# Altium PCB bidirectional_audio_v4.0.PcbDoc
Units mil, origin at the board's own origin, x right, y up, seen from the top; angles counter-clockwise.
Board outline 1509.03 x 3854.32 mil, 4 copper layers (Top Layer, Gnd1, Vreg, Bottom Layer); 102 components, 71 nets, 302 pads, 148 vias.
Unrouted connection lines stored in the file: 89.
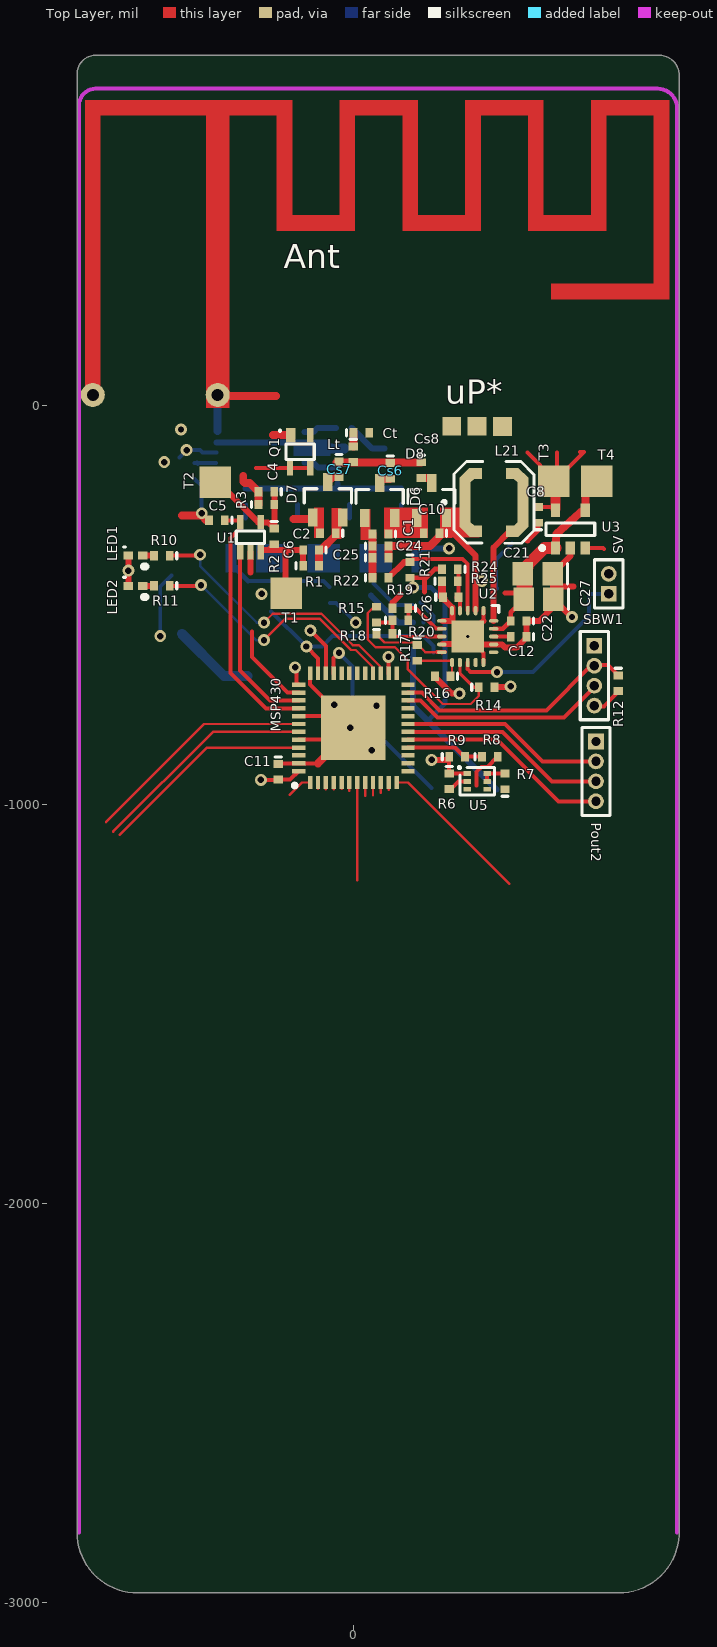
[diagram p0: Top Layer view]
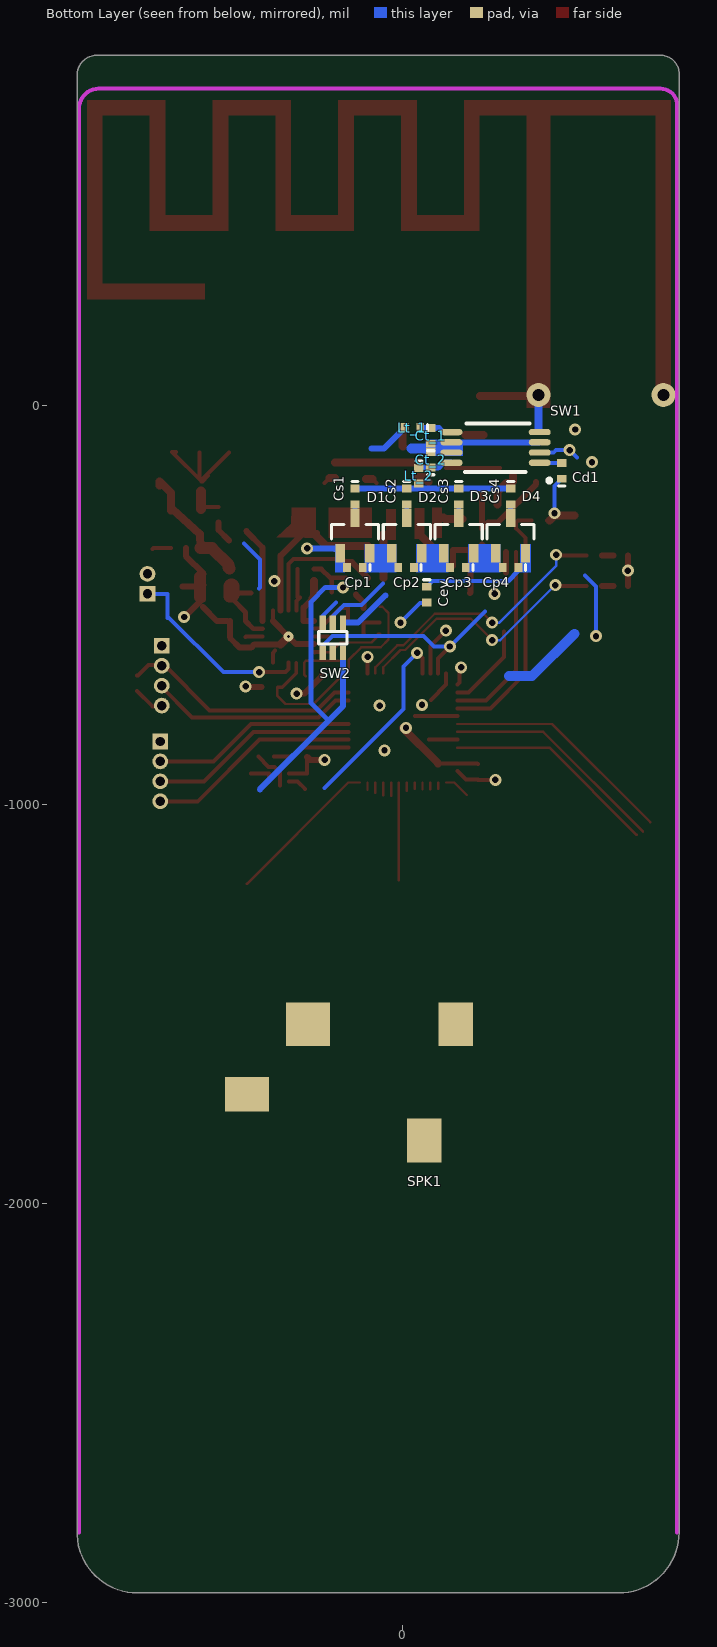
[diagram p1: Bottom Layer view, seen from below]
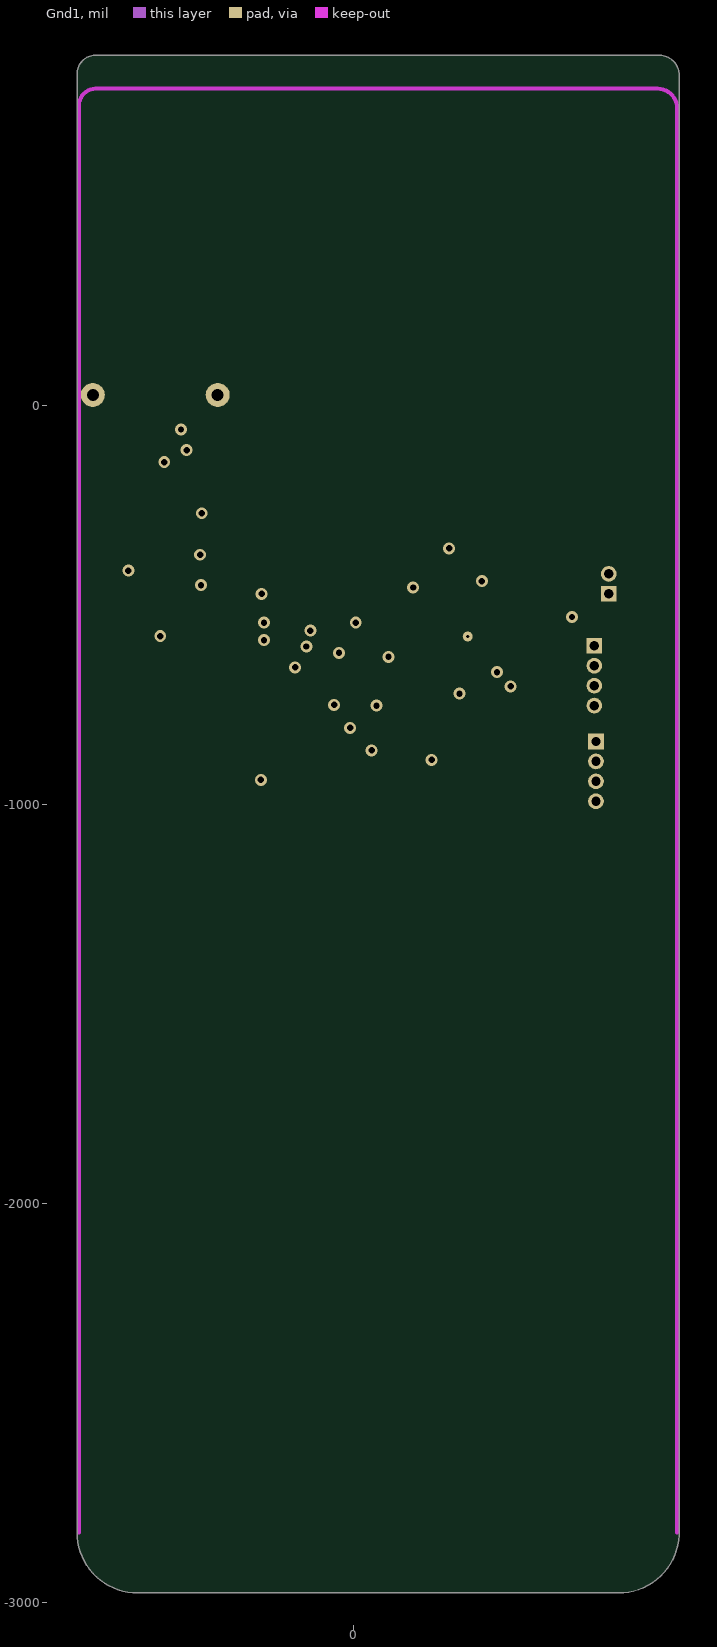
[diagram p2: Gnd1]
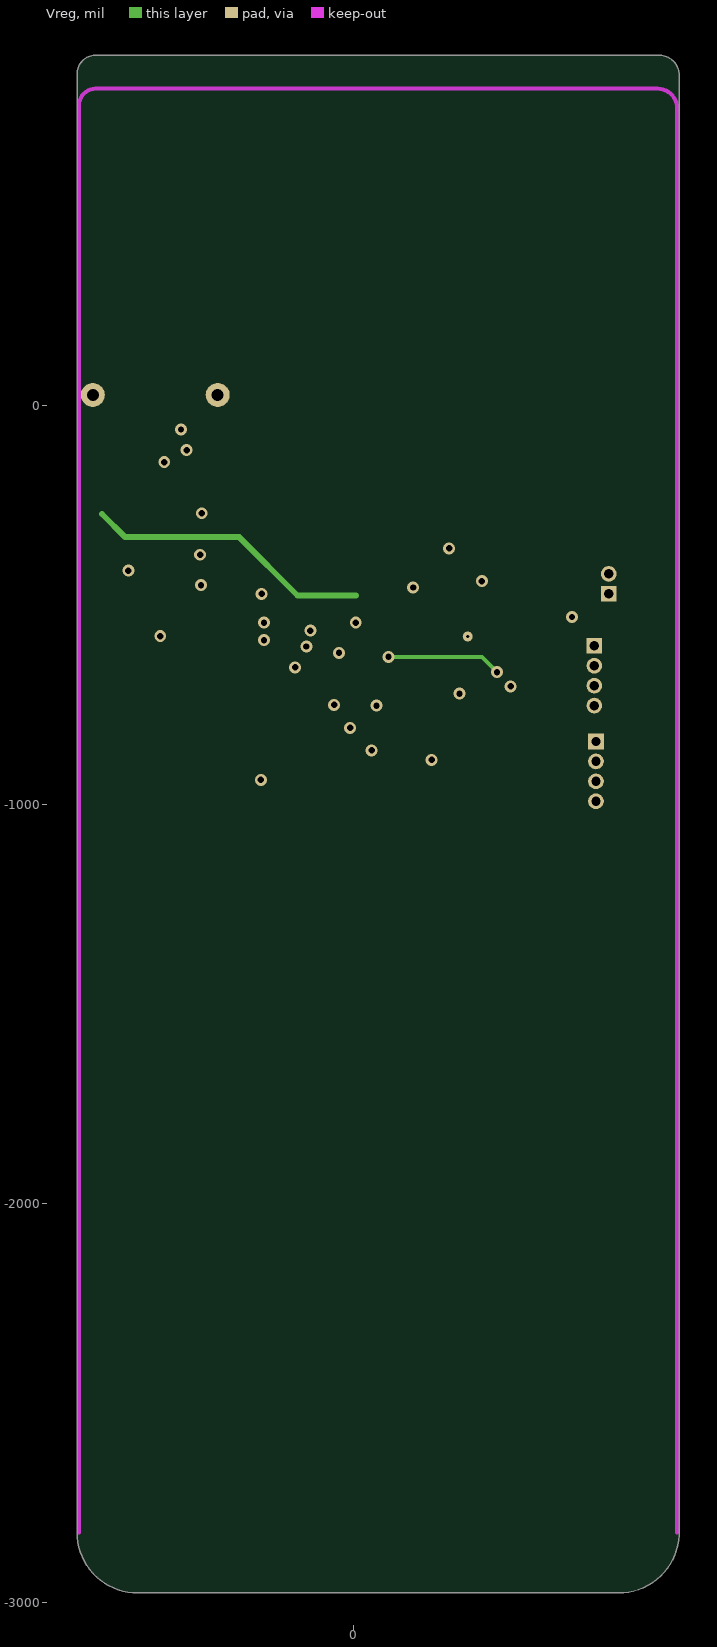
[diagram p3: Vreg]

## Layer stack, top to bottom
Top Layer: signal copper 1.4
Dielectric: core 12.6, FR-4, Dk 4.8
Gnd1: signal copper 1.4
Dielectric: prepreg 12.6, FR-4, Dk 4.8
Vreg: signal copper 1.4
Dielectric: core 12.6, FR-4, Dk 4.8
Bottom Layer: signal copper 1.4

## Board outline
-692.52,-2824 -692.52,831.28 cw(c-645.88,831.28) -648.1,877.86 cw(c-645.88,873.36) -645.88,878.38 766.4,878.38 cw(c766.4,873.36) 768.33,877.99 cw(c766.4,827.92) 816.52,827.92 cw(c766.4,827.92) 816.51,827.62 816.52,827.92 816.52,-2830 cw(c811.5,-2830) 816.34,-2831.32 cw(c664.58,-2824) 664.58,-2975.94 -540.58,-2975.94 cw(c-540.58,-2824)

## Design rules (kind name [scope] priority, off if disabled: settings)
Clearance "Clearance~Sunstone Circuits" [All] p1: gap=6 // Sunstone Circuits Minimum Clearance Rule (MLB~4&6 Layer Designs)
HoleSize "HoleSize~Sunstone Circuits" [All] p1: absolutevalues=TRUE maxlimit=251 minlimit=8 maxpercent=80.000 minpercent=20.000 // Sunstone Circuits Hole Size Rule (MLB~4&6 Layer Designs)
HoleSize Testpoint [All] p2: absolutevalues=TRUE maxlimit=100 minlimit=1 maxpercent=80.000 minpercent=20.000
HoleSize TestPointUsage [All] p3: absolutevalues=TRUE maxlimit=100 minlimit=1 maxpercent=80.000 minpercent=20.000
MinimumAnnularRing "MinimumAnnularRing~Sunstone Circuits" [All] p1: minimumring=7 // Sunstone Circuits Minimum Annular Ring (MLB~4&6 Layer Designs)
MinimumSolderMaskSliver [All] p1: minsoldermaskwidth=0
PlaneClearance "PlaneClearance~Sunstone Circuits" [All] p1: clearance=12 // Sunstone Circuits Power Plane Clearance Rule (MLB~4&6 Layer Designs)
PlaneConnect "PlaneConnect~Sunstone Circuits" [All] p1: planeconnectstyle=Relief reliefexpansion=10 reliefentries=4 reliefconductorwidth=8 reliefairgap=10 // Sunstone Circuits Power Plane Connect Rule (MLB~4&6 Layer Designs)
PolygonConnect "PolygonConnect~Sunstone Circuits" [All] p1: connectstyle=Relief reliefconductorwidth=8 reliefentries=4 polygonreliefangle="90 Angle" airgapwidth=10 // Sunstone Circuits Polygon Connect Style (MLB~4&6 Layer Designs)
RoutingVias "RoutingVias~Sunstone Circuits" [All] p1: holewidth=16 width=30 viastyle="Through Hole" minholewidth=8 minwidth=24 maxholewidth=20 maxwidth=40 // Sunstone Circuits Routing Vias Rule (MLB~4&6 Layer Designs)
ShortCircuit "ShortCircuit~Sunstone Circuits" [All] p1: allowed=FALSE // Sunstone Circuits Short Circuit Rule~Do Not Allow (MLB~4&6 Layer Designs)
SolderMaskExpansion "SolderMaskExpansion~Sunstone Circuits" [All] p1: expansion=3 // Sunstone Circuits Solder Mask Expansion Rule (MLB~4&6 Layer Designs)
ViasUnderSMD "ViasUnderSMD~Sunstone Circuits" [All] p1: allowed=FALSE // Sunstone Circuits Vias Under SMD~Do Not Allow (MLB~4&6 Layer Designs)
Width "Width~Sunstone Circuits" [All] p1: maxlimit=100 minlimit=6 preferedwidth=10 // Sunstone Circuits Minimum Width Rule (MLB~4&6 Layer Designs)
23 further rules are at their usual default settings.

## Classes and differential pairs
component class bidirectional_audio_v4.0_AFE: Ant C1 C2 C4 C5 C6 C8 C10 C12 C21 C22 C24 C25 C26 C27 Cd1 Cev Cp1 Cp2 Cp3 Cp4 Cs1 Cs2 Cs3 Cs4 Cs6 Cs7 Cs8 Ct Ct_1 Ct_2 D1 D2 D3 D4 D6 D7 D8 L21 Lt Lt_1 Lt_2 Q1 Q2 R1 R2 R3 R14 R15 R16 R17 R18 R19 R20 R21 R22 R24 R25 SMA1 SPK SPK1 SW1 SW2 T1 T2 T3 T4 T5 TF1 U1 U2 U3 uP*
component class bidirectional_audio_v4.0_Digital: 0 1 2 3 4 5 6 7 8 9 # * A B C C11 LED1 LED2 MSP430 Pout2 R6 R7 R8 R9 R10 R11 R12 SBW1 SV U5

## Components (designator, comment, footprint, x,y, rotation, side; value= is the part's Value field where it differs from the comment)
0 "Cap touch" CAPTOUCH-8mm#1 -4386,-1372 r90 top
1 "Cap touch" CAPTOUCH-8mm#2 -4000,-1392 r90 top
2 "Cap touch" CAPTOUCH-8mm#3 -3554,-1392 r90 top
3 "Cap touch" CAPTOUCH-8mm#4 -4382,-1780 r90 top
4 "Cap touch" CAPTOUCH-8mm#5 -3986,-1786 r90 top
5 "Cap touch" CAPTOUCH-8mm#6 -3542,-1786 r90 top
6 "Cap touch" CAPTOUCH-8mm#7 -4408,-2164 r90 top
7 "Cap touch" CAPTOUCH-8mm#8 -4034,-2166 r90 top
8 "Cap touch" CAPTOUCH-8mm#9 -3588,-2166 r90 top
9 "Cap touch" CAPTOUCH-8mm#10 -4022,-2598 r90 top
# "Cap touch" CAPTOUCH-8mm#11 -3586,-2634 r90 top
* "Cap touch" CAPTOUCH-8mm#12 -4436,-2618 r0 top
A "Cap touch" CAPTOUCH-8mm#13 -4376,-1018 r90 top
Ant "ANT" PIFA_915MHZ -340,-6 r0 top net-tie
B "Cap touch" CAPTOUCH-8mm#13 -3976,-1018 r90 top
C "Cap touch" CAPTOUCH-8mm#13 -3576,-1018 r90 top
C1 "Cp_rect" 0402 68,-322 r180 top
C2 "Cdemod_1" 0402 -64,-320 r180 top
C4 "Cdemod_2" 0402 -218,-216 r180 top
C5 "Decap_rx" 0402 -342,-288 r180 top
C6 "Cdemod_3" 0402 -106,-362 r180 top
C8 "Cout_LDO" 0402 464,-274 r90 top
C10 "Cp_rect" 0402 196,-320 r180 top
C11 "Cdecap_MSP" 0402 -188,-918 r270 top
C12 "Cbat" 0402 414,-580 r180 top
C21 "Cstore" 0805-W 462,-422 r180 top
C22 "Cstore" 0402 414,-540 r180 top
C24 "Cin_boost1" 0402 68,-352 r0 top
C25 "Cin_boost2" 0402 68,-382 r0 top
C26 "Cref" 0402 244,-480 r0 top
C27 "Cstore2" 0805-W 464,-486 r180 top
Cd1 "Decap_SW" 0402 -398,-164 r90 bottom
Cev "Cout_env" 0402 -60,-474 r270 bottom
Cp1 "Cp_env" 0402 120,-406 r0 bottom
Cp2 "Cp_env" 0402 -8,-406 r0 bottom
Cp3 "Cp_env" 0402 -138,-406 r0 bottom
Cp4 "Cp_env" 0402 -270,-406 r0 bottom
Cs1 "Cs_env" 0402 120,-228 r270 bottom
Cs2 "Cs_env" 0402 -10,-228 r270 bottom
Cs3 "Cs_env" 0402 -140,-228 r270 bottom
Cs4 "Cs_env" 0402 -270,-228 r270 bottom
Cs6 "Cs_rect" 0402 92,-164 r270 top
Cs7 "Cs_rx" 0402 -36,-160 r270 top
Cs8 "Cs_rect" 0402 170,-162 r270 top
Ct "C_Ant_tune" 0402 20,-68 r0 top
Ct_1 "Cap" 0402 -70,-76 r90 bottom
Ct_2 "Cap" 0402 -70,-136 r90 bottom
D1 "SMS7630-005" "SOT23 - N" 120,-326 r90 bottom
D2 "SMS7630-005" "SOT23 - N" -10,-326 r90 bottom
D3 "SMS7630-005" "SOT23 - N" -140,-326 r90 bottom
D4 "SMS7630-005" "SOT23 - N" -270,-326 r90 bottom
D6 "SMS7630-005" "SOT23 - N" 66,-238 r90 top
D7 "SMS7630-005" "SOT23 - N" -64,-236 r90 top
D8 "SMS7630-005" "SOT23 - N" 196,-238 r90 top
L21 "Ind_LPS4018" LPS4018 344,-238 r90 top
LED1 "LED" "Diode - 0402" -546,-376 r0 top
LED2 "LED" "Diode - 0402" -546,-452 r0 top
Lt "L_Ant_tune" 0402 0,-122 r270 top
Lt_1 "Ind" 0402 -24,-56 r0 bottom
Lt_2 "Ind" 0402 -40,-176 r270 bottom
MSP430 "MSP430 Wolverine 48-Pin" MSP_QFN48_RGZ_PAD0 0,-808 r90 top
Pout2 "MHDR1X4" MHDR1X4 608,-842 r270 top
Q1 "BF1101WR" SOT343R -134,-114 r180 top
Q2 "BF1101WR" SOT343R 1055,-76 r0 top
R1 "Res_demod1" 0402 -106,-402 r0 top
R2 "Res_demod2" 0402 -198,-328 r270 top
R3 "Res_demod3" 0402 -218,-248 r0 top
R6 "Res_HSS" 0402 240,-941.69 r270 top
R7 "Res_HSS" 0402 380,-942 r90 top
R8 "Res_HSS" 0402 342,-880 r0 top
R9 "Res_HSS" 0402 260,-880 r0 top
R10 "Res_LED" 0402 -480,-376 r180 top
R11 "Res_LED" 0402 -480,-452 r180 top
R12 "Res_flash" 0402 664,-696 r270 top
R14 "Rout1" 0402 334,-706 r0 top
R15 "Rout2" 0402 58,-524 r90 top
R16 "Rok1" 0402 224,-678 r180 top
R17 "Rok2" 0402 160,-620 r270 top
R18 "Rok3" 0402 78,-572 r180 top
R19 "Rov1" 0402 118,-508 r180 top
R20 "Rov2" 0402 118,-538 r0 top
R21 "R_80%" 0402 142,-412 r270 top
R22 "R_50%" 0402 68,-432 r0 top
R24 "Res_MPPTfixed" 0402 242,-410 r180 top
R25 "Res_MPPTfixed" 0402 242,-440 r0 top
SBW1 "MHDR1X4" MHDR1X4 604,-602 r270 top
SMA1 "SMA Port" "SMA - Hole - 2 Pin" -1028,172 r90 top
SPK "Header 2" HDR1X2 -1228,-118 r0 top
SPK1 "Headphone jack" CONN_JACK -132.74,-1550.66 r0 bottom
SV "MHDR1X2" MHDR1X2 640,-472 r90 top
SW1 "ADG919" MSOP_8pin -230,-106 r0 bottom
SW2 "ADG841" SC70-6 174,-582 r0 bottom
T1 "Test Point SMT" SMT_TESTPOINT_2MM -168,-470 r90 top
T2 "Test Point SMT" SMT_TESTPOINT_2MM -346,-192 r0 top
T3 "Test Point SMT" SMT_TESTPOINT_2MM 502,-190 r0 top
T4 "Test Point SMT" SMT_TESTPOINT_2MM 610,-190 r0 top
TF1 "Audio_TF" AUDIO_TF -968,-232 r270 bottom
U1 "Comparator" SC70-5 -258,-330 r0 top
U2 "BQ25570" BQ25570 286.63,-579.04 r270 top
U3 "TPS780270200DDCT" TI-DDC5_L 544,-310 r90 top
U5 "SI1016X" "SC-89-6 Vishay" 310,-942 r0 top
uP* "Electret Microphone" uP_23024 310,-52 r180 top

## Footprints (in the part's own frame and the unit in brackets; to place one, negate y for a bottom-side part, rotate by r counter-clockwise, add the part's x,y. Pads: shape width x height; smd on the part's side, far side on the other; paste and mask are expansions set on the pad)
0402 [mm] "Surface Mount; Body 1 x 0.5 mm (LxW typ)"
  rect 0.5x0.6 smd: 1(-0.5,0) 2(0.5,0)
  silkscreen extent -0.95,-0.2 -0.95,0.2, body extent -0.5,-0.25 0.5,0.25, height 0.5
0805-W [mm] "Surface Mount - Wide; Body 2.0 x 1.25 mm (LxW typ)"
  rect 1.3x1.5 smd: 1(-0.95,0) 2(0.95,0)
  silkscreen extent -1.9,-0.65 -1.9,0.65, body extent -1,-0.62 1,0.63, height 1.25
AUDIO_TF [mil] "Audio Transformer Triad"
  round 60 hole 30: 1(0,0) 2(0,100) 3(0,200) 4(300,200) 5(300,100) 6(300,0)
  body extent -30,-35 330,235, height 100
BQ25570 [mm] "Boost Charger"
  oval 0.6x0.24 smd paste-0.025 mask+0.07: 1(-1.65,1) 2(-1.65,0.5) 3(-1.65,0) 4(-1.65,-0.5) 5(-1.65,-1) 11(1.65,-1) 12(1.65,-0.5) 13(1.65,0) 14(1.65,0.5) 15(1.65,1)
  oval 0.24x0.6 smd paste-0.025 mask+0.07: 6(-1,-1.65) 7(-0.5,-1.65) 8(0,-1.65) 9(0.5,-1.65) 10(1,-1.65) 16(1,1.65) 17(0.5,1.65) 18(0,1.65) 19(-0.5,1.65) 20(-1,1.65)
  round 0.635 hole 0.203: 21(0,0)
  rect 2.05x2.05 smd: 21(0,0)
  silkscreen extent -1.97,1.54 -1.54,1.98, body extent -1.82,-1.82 1.83,1.83, height 1.01
CAPTOUCH-8mm#1 [mil]
  oct 315x315 smd: 1(-46,-10)
CAPTOUCH-8mm#2 [mil]
  oct 315x315 smd: 1(-26,-24)
CAPTOUCH-8mm#3 [mil]
  oct 315x315 smd: 1(-26,22)
CAPTOUCH-8mm#4 [mil]
  oct 315x315 smd: 1(-38,-6)
CAPTOUCH-8mm#5 [mil]
  oct 315x315 smd: 1(-32,-10)
CAPTOUCH-8mm#6 [mil]
  oct 315x315 smd: 1(-32,34)
CAPTOUCH-8mm#7 [mil]
  oct 315x315 smd: 1(-54,-32)
CAPTOUCH-8mm#8 [mil]
  oct 315x315 smd: 1(-52,-58)
CAPTOUCH-8mm#9 [mil]
  oct 315x315 smd: 1(-52,-12)
CAPTOUCH-8mm#10 [mil]
  oct 315x315 smd: 1(-20,-46)
CAPTOUCH-8mm#11 [mil]
  oct 315x315 smd: 1(16,-10)
CAPTOUCH-8mm#12 [mil]
  oct 315x315 smd: 1(60,0)
CAPTOUCH-8mm#13 [mil]
  oct 315x315 smd: 1(0,0)
CONN_JACK [mm] "PCB footprint for the headphone jack"
  rect 2.2x2.8 smd: 1(0,0) 3(2,7.4)
  rect 2.8x2.8 smd: 2(9.4,0)
  rect 2.8x2.2 smd: 4(13.3,4.45)
"Diode - 0402" [mm] "Diode: Body 1.6 x 0.8 mm (LxW typ)"
  rect 0.6x0.5 smd: 1(0.45,0) 2(-0.45,0)
  silkscreen extent -0.75,-0.7 0.63,0.55
HDR1X2 [mm] "Connector; Header; 2 Position"
  rect 1.5x1.5 hole 0.9: 1(0,0)
  round 1.5 hole 0.9: 2(2.54,0)
  silkscreen extent -1.27,-1.27 3.81,1.27
LPS4018 [mil] "Inductor"
  rect 28x31.5 smd: 1(-77.03,37.61) 1(67.97,37.61) 2(-77.03,-54.39) 2(67.97,-54.39)
  rect 35.5x28 smd rot 45: 1(-68.53,55.61) 2(59.47,-72.39)
  rect 123x28 smd: 1(-4.53,64.11) 2(-4.53,-80.89)
  rect 35.5x28 smd rot 135: 1(59.47,55.61) 2(-68.03,-72.89)
  silkscreen extent -107,-109 98,120, body extent -85,-89 76,72, height 71
MHDR1X2 [mm] "Connector; Header; 2 Position"
  rect 1x1 hole 0.6: 1(0,0)
  round 1 hole 0.6: 2(1.27,0)
  silkscreen extent -0.9,-0.9 2.17,0.9
MHDR1X4 [mm] "Connector; Header; 4 Position"
  rect 1x1 hole 0.6: 1(0,0)
  round 1 hole 0.6: 2(1.27,0) 3(2.54,0) 4(3.81,0)
  silkscreen extent -0.9,-0.9 4.71,0.9
MSOP_8pin [mm]
  oval 1.4x0.4 smd: 1(-2.872,0.95) 2(-2.872,0.3) 3(-2.872,-0.35) 4(-2.87,-1.001) 5(2.745,-1) 6(2.745,-0.35) 7(2.745,0.3) 8(2.745,0.95)
  silkscreen extent -3.6,-1.55 1.88,2.21
MSP_QFN48_RGZ_PAD0 [mm]
  rect 4.1x4.1 smd: 0(0,0)
  rect 0.85x0.28 smd: 1(-3.475,2.75) 2(-3.475,2.25) 3(-3.475,1.75) 4(-3.475,1.25) 5(-3.475,0.75) 6(-3.475,0.25) 7(-3.475,-0.25) 8(-3.475,-0.75) 9(-3.475,-1.25) 10(-3.475,-1.75) 11(-3.475,-2.25) 12(-3.475,-2.75) 25(3.475,-2.75) 26(3.475,-2.25) 27(3.475,-1.75) 28(3.475,-1.25) 29(3.475,-0.75) 30(3.475,-0.25) 31(3.475,0.25) 32(3.475,0.75) 33(3.475,1.25) 34(3.475,1.75) 35(3.475,2.25) 36(3.475,2.75)
  rect 0.28x0.85 smd: 13(-2.75,-3.475) 14(-2.25,-3.475) 15(-1.75,-3.475) 16(-1.25,-3.475) 17(-0.75,-3.475) 18(-0.25,-3.475) 19(0.25,-3.475) 20(0.75,-3.475) 21(1.25,-3.475) 22(1.75,-3.475) 23(2.25,-3.475) 24(2.75,-3.475) 37(2.75,3.475) 38(2.25,3.475) 39(1.75,3.475) 40(1.25,3.475) 41(0.75,3.475) 42(0.25,3.475) 43(-0.25,3.475) 44(-0.75,3.475) 45(-1.25,3.475) 46(-1.75,3.475) 47(-2.25,3.475) 48(-2.75,3.475)
  silkscreen extent -3.78,3.63 -3.55,3.85, body extent -3.3,-3.3 3.3,3.3, height 1
PIFA_915MHZ [mil]
  round 60 hole 30: 1(0,32.68) 2(-312.99,32.68)
  Top Layer region: -332.68,39.37 -293.31,39.37 -293.31,732.28 -332.68,732.28
  Top Layer region: -332.68,732.28 187.01,732.28 187.01,771.65 -332.68,771.65
  Top Layer region: -29.53,0 29.53,0 29.53,732.28 -29.53,732.28
  Top Layer region: 147.64,443.7 187.01,443.7 187.01,732.28 147.64,732.28
  Top Layer region: 305.12,732.28 501.97,732.28 501.97,771.65 305.12,771.65
  Top Layer region: 935.04,732.28 1131.89,732.28 1131.89,771.65 935.04,771.65
  Top Layer region: 1092.52,272.05 1131.89,272.05 1131.89,732.28 1092.52,732.28
  Top Layer region: 620.08,732.28 816.93,732.28 816.93,771.65 620.08,771.65
  Top Layer region: 835.83,272.05 1092.52,272.05 1092.52,311.42 835.83,311.42
  Top Layer region: 777.56,443.7 974.41,443.7 974.41,483.07 777.56,483.07
  Top Layer region: 462.6,443.7 659.45,443.7 659.45,483.07 462.6,483.07
  Top Layer region: 147.64,443.7 344.49,443.7 344.49,483.07 147.64,483.07
  Top Layer region: 305,480 344.37,480 344.37,768.58 305,768.58
  Top Layer region: 462.6,483.07 501.97,483.07 501.97,771.65 462.6,771.65
  Top Layer region: 620.08,483.07 659.45,483.07 659.45,771.65 620.08,771.65
  Top Layer region: 777.56,483.07 816.93,483.07 816.93,771.65 777.56,771.65
  Top Layer region: 935.04,483.07 974.41,483.07 974.41,771.65 935.04,771.65
SC70-5 [mm] "SC70-5"
  rect 0.4x0.92 smd: 1(-0.65,-0.95) 2(0,-0.95) 3(0.65,-0.95) 4(0.65,0.95) 5(-0.65,0.95)
  silkscreen extent -0.9,-0.4 0.9,0.4
SC70-6 [mm] "Audio Switch"
  rect 0.4x0.92 smd: 1(-0.616,-0.957) 2(0.034,-0.957) 3(0.684,-0.957) 4(0.684,0.943) 5(0.034,0.943) 6(-0.616,0.943)
  silkscreen extent -0.87,-0.41 0.93,0.39
"SC-89-6 Vishay" [mm]
  rect 0.478x0.3 smd: 1(-0.638,0.5) 2(-0.638,0) 3(-0.638,-0.5) 4(0.638,-0.5) 5(0.638,0) 6(0.638,0.5)
  silkscreen extent -1.15,-0.87 1.11,0.91
"SMA - Hole - 2 Pin" [mm] "SMA port for wisp"
  round 2 hole 1.5: 1(0,1.796) 2(0,-1.796)
  silkscreen extent -1.02,0 1.02,0
SMT_TESTPOINT_2MM [mm]
  rect 2x2 smd: 1(0,0)
"SOT23 - N" [mm] "SOT23, 3-Leads, Body 2.9x1.3mm, Pitch 0.95mm, Lead Span 2.3mm - Reverse Pinning, IPC Medium Density"
  rect 1.15x0.6 smd: 1(-1.125,0.95) 2(-1.125,-0.95) 3(1.125,0)
  silkscreen extent -0.2,-1.5 0.7,1.5, body extent -0.7,-1.5 0.7,1.5, height 1.1
SOT343R [mm] "SOT343R - Package for BF1101WR"
  rect 0.6x0.92 smd: 1(0.584,-1.016)
  rect 0.4x0.92 smd: 2(-0.664,-1.007) 3(-0.664,1.093) 3(0.636,1.093)
  silkscreen extent -0.91,-1.3 1.27,0.54
TI-DDC5_L [mm] "SOT23, 5-Leads, Body 2.9x1.6mm, Pitch 0.95mm, IPC High Density"
  rect 0.85x0.6 smd: 1(-1.2,0.95) 2(-1.2,0) 3(-1.2,-0.95) 4(1.2,-0.95) 5(1.2,0.95)
  silkscreen extent -1.32,-1.55 0.4,1.92, body extent -0.87,-1.52 0.87,1.53, height 1.1
uP_23024 [mm]
  rect 1.2x1.2 smd: 1(-1.61,0.01) 2(0,0) 3(1.61,0)

## Part data
C1 C2 C4 C5 C6 C8 C10 C11 C12 C21 C22 C24 C25 C26 C27 Cev Cp1 Cp2 Cp3 Cp4 Cs1 Cs2 Cs3 Cs4 Cs6 Cs7 Cs8 Ct: library part Cap, "Ceramic Capacitor (Surface Mount)"
Cd1: library part Ceramic_Chip_Capacitor, "Ceramic Capacitor - Standard"
Ct_1 Ct_2: "Ceramic Capacitor (Surface Mount)"
D1 D2 D3 D4 D6 D7 D8: "Agilent Schottky Diode, Two in Series, Small Package SOT-323"
L21 Lt_1 Lt_2: "Inductor (Surface Mount)"
LED1 LED2: library part "Diode - picoLED", "Typical RED, GREEN, YELLOW, AMBER GaAs LED"
Lt: library part Ind, "Inductor (Surface Mount)"
MSP430: library part MSP430FR596X_586X_RGZ, "16-bit FRAM MCU"
Pout2 SBW1: "Header, 4-Pin"
Q1 Q2: "N-Channel Dual-Gate Mos-Fets MOSFET, SOT343R"
R1 R2 R3 R6 R7 R8 R9 R10 R11 R12 R14 R15 R16 R17 R18 R19 R20 R21 R22 R24 R25: library part Res, "Chip Resistor (Surface Mount)"
SMA1: "Two pin SMA connector wisp"
SPK SV: "Header, 2-Pin"
SPK1: library part CONN_JACK
SW1: "RF 2:1 MUX/SPDT Reflective"
SW2: "Audio Switch"
T1 T2 T3 T4: "Test Point, Flat Pad"
TF1: "Audio Transformer by Triad"
U1: library part NCS2200, "Comparator: On Semi 10uA Comparator"
U2: "Boost Charger"
U3: library part CMP-0394-01119-1, "Single Output LDO, 150 mA, Adjustable 1.22 to 5.25 V Output, 2.2 to 5.5 V Input, with 500 nA Quiescent Current, 5-pin SOT (DDC), -40 to 125 degC, Green (RoHS & no Sb/Br)"
U5: "NMOS and PMOS array"
uP*: library part UP_Knowles_23024

## Via types
v1: diameter 30, hole 16, Top Layer to Bottom Layer, tented both sides, 128 vias
v2: diameter 30, hole 16, Top Layer to Bottom Layer, 20 vias

## Nets (pads, with @x,y where several pads share a name; then routed paths per layer and width w, separated by ;. In a path a pad name is that pad's centre, name@x,y a point inside that pad or via, vN(x,y) a via of type N, cw(c..) or ccw(c..) an arc to the next point about the centre after c; other vN are vias at no path point)
AN_EN: Cd1.2 MSP430.34 SW1.1 | length 181.4
  Top Layer w10: v2(-108,-564) -68.9,-603.1 MSP430.34
  Bottom Layer w10: Cd1.2 SW1.1@-344.16,-143.95 ; Cd1.2@-391.7,-143.39 -392.31,-144 Cd1.2@-390,-146.31
ANT: Ant.1 Ct.1 Lt.1 Q1.2 SMA1.1 SW1.4 | length 268.1
  Top Layer w20: v2(-340,23.53) -193.53,23.53 ; Lt.1 0.31,-102 Ct.1
  Bottom Layer w20: SW1.4@-340,-63.61 v2(-340,23.53)
AUDIO_NEG: SPK1.2 TF1.6 | length 208
  Bottom Layer w25: -430,-572 -324,-678 -265.92,-678
AUDIO_OUT: SPK.1 SW2.1 TF1.3 | length 854.5
  Vreg w15: -630,-272 -572,-330 -286,-330 -140,-476 6,-476
  Bottom Layer w15: 44,-476 112.32,-544.32 SW2.1
  other v2: -230,-472
AUDIO_POS: SPK1.3 TF1.4
DMD_N: C4.1 R2.1 R3.2 T2.1 U1.4 | length 279.5
  Top Layer w15: T2.1@-334,-192 -334,-197.11 -238.51,-292.6 U1.4 -213.72,-292.6 R2.1 C4.1@-198,-216
GND: Ant.2 C1.2 C2.2 C4.2 C5.2 C8.1 C11.1 C12.1 C21.1 C22.1 C24.1 C25.1 C26.1 C27.1 Cd1.1 Cev.2 Cp1.2 Ct.2 Ct_1.1 Ct_2.2 D1.1 D6.1 D7.1 LED1.2 LED2.2 MSP430.0 MSP430.36 MSP430.41 MSP430.44 MSP430.47 Pout2.1 Q1.1 Q2.1 R3.1 R6.1 R9.1 R14.2 R16.2 R19.2 R22.1 R25.1 SBW1.1 SMA1.2 SPK.2 SV.2 SW1.3 SW1.6 SW1.7 SW2.3 TF1.1 U1.2 U2.1 U2.5 U2.6 U2.9 U2.15 U2.17 U2.21 U3.2 U5.1 uP*.1 uP*.2 | length 2832.7
  Top Layer w10: C5.2@-368,-288 C5.2 ; C11.1 -186.27,-896.58 MSP430.47 -88.58,-896.58 ; MSP430.44 MSP430.0@-66,-837.53 ; MSP430.41 MSP430.0@-30,-778.47 ; MSP430.36 -108.27,-699.73 MSP430.0@-70,-738 ; R9.1@240,-880.32 R6.1 284.57,-922 U5.1 ; U2.21@320,-614 326,-620 U2.15 ; U2.21@326,-539.67 U2.1
  Top Layer w15: LED2.2 LED1.2 ; -258,-418 U1.2 ; R19.2 98.31,-493.69 118,-474 ; v1(196,-888) 232.31,-888 R9.1@240,-880.32 ; R16.2 204.31,-679.38 246.94,-722 v1(266,-722) ; U2.9@223.04,-598 267.67,-598 286.63,-579.04 U2.21@326,-539.67 ; U2.6@223.04,-540 248.63,-540 248.63,-521.93 248.44,-521.74 248.44,-506.44 C26.1@226,-484 ; U2.21@306.31,-598.72 U2.17 372.29,-598.72 380.35,-606.78 409.22,-606.78 C12.1@432,-584 ; R14.2 392,-706 v1(394,-704) ; C12.1 C22.1 ; 436,-338 462,-312 C8.1@462,-293.69 ; C22.1@439.69,-540 466,-540 C27.1@501.4,-504.6 ; C21.1 544,-377.4 U3.2 ; C21.1@500,-450 504,-454 552,-454 ; C27.1 C27.1@508,-479.4 ; C27.1@508,-459.4 501.4,-466 501.4,-484.6 v1@547.4,-530.6
  Top Layer w20: -430,-276 -380,-276 C5.2@-368,-288 ; -276,-176 -276,-190 -272,-194 -259.69,-194 C4.2 R3.1 ; -202,-74 Q1.1 ; -150,-284 -105.11,-284 D7.1 ; -88.58,-896.58 MSP430.0 ; D6.1@28.6,-291.4 D6.1 ; R22.1 C25.1 C24.1 C1.2 ; R25.1 222.31,-480.31 C26.1@226,-484 ; U2.21@286.63,-579.04 U2.21@306.31,-598.72
  Top Layer w30: C27.1@508,-479.4 508,-459.4 C21.1@508,-429.4
  Bottom Layer w10: Cd1.1 -380,-201.69 v1(-380,-270) ; Cev.2@-59.16,-494.84 -43.16,-494.84 v1(6,-544) ; 168,-494 200.93,-526.93 SW2.3
  Bottom Layer w15: v1(-432,-60) v1@-429.69,-60 ; SW1.3 SW1.6 ; -74,-106 Ct_2.2@-72,-108 ; D1.1 D1.1@159.71,-370.29 ; 171,-359 172,-358 v1(240,-358)
  Bottom Layer w25: Ct_2.2@-72,-108 -22,-108
  other v1: -3770,-2754 -4174,-2742 -4576,-2728 -3362,-2714 -4632,-2628 -4174,-2610 -3778,-2610 -3330,-2610 -3228,-2610 -4632,-2522 -3330,-2504 -3228,-2504 -4532,-2420 -4457,-2420 -4382,-2420 -4307,-2420 -4232,-2420 -4124,-2420 -4049,-2420 -3974,-2420 -3899,-2420 -3824,-2420 -3700,-2418 -3625,-2418 -3550,-2418 -3475,-2418 -3400,-2418 -4630,-2410 -3328,-2392 -3226,-2392 -4630,-2304 -3328,-2286 -3226,-2286 -4630,-2198 -3328,-2180 -4630,-2092 -3328,-2074 -3226,-2074 -4542,-2016 -4467,-2016 -4392,-2016 -4317,-2016 -4242,-2016 -4134,-2016 -4059,-2016 -3984,-2016 -3909,-2016 -3834,-2016 -3710,-2014 -3635,-2014 -3560,-2014 -3485,-2014 -3410,-2014 -4628,-1980 -3326,-1962 -3224,-1962 -4628,-1874 -3326,-1856 -3224,-1856 -4628,-1716 -3326,-1698 -3224,-1698 -4465,-1618 -4390,-1618 -4315,-1618 -4240,-1618 -4132,-1618 -4057,-1618 -3982,-1618 -3907,-1618 -3832,-1618 -3708,-1616 -3633,-1616 -3558,-1616 -3483,-1616 -3408,-1616 -4628,-1610 -3326,-1592 -3224,-1592 -4626,-1498 -3324,-1480 -3222,-1480 -4626,-1392 -3324,-1374 -3222,-1374 -4626,-1286 -3324,-1268 -3222,-1268 -4498,-1214 -4423,-1214 -4348,-1214 -4273,-1214 -4090,-1214 -4015,-1214 -3940,-1214 -3865,-1214 -3696,-1212 -3621,-1212 -3546,-1212 -3471,-1212 -3396,-1212 -4626,-1180 -3324,-1162 -3222,-1162 -4624,-1068 -3322,-1050 -3220,-1050 -4624,-962 -3322,-944 -3220,-944 46,-864 -3611,-826 -3536,-826 -4380,-822 -4305,-822 -8,-808 58,-752 -48,-750 548,-530 -563.72,-414 -2128,-166
LED1: MSP430.27 R10.1 | length 696.7
  Top Layer w6: v2@-386,-376 v2(-384,-374) ; v2(-224,-544) -202,-522 -80.07,-522 -1.26,-600.81 13.81,-600.81 68.9,-655.9 MSP430.27
  Top Layer w10: R10.1 v2@-386,-376
  Bottom Layer w6: v2(-384,-374) -384,-402 -242,-544 v2(-224,-544)
LED2: MSP430.28 R11.1 | length 655.7
  Top Layer w6: v2@-384,-452 v2(-382,-450) ; v2(-224,-588) -170,-534 -85.04,-534 -6.23,-612.81 6.12,-612.81 49.21,-655.9 MSP430.28
  Top Layer w10: R11.1 v2@-384,-452
  Bottom Layer w6: v2(-382,-450) -244,-588 v2(-224,-588)
MEAS_EN: MSP430.33 R6.2 U5.2 | length 589.1
  Top Layer w10: v2(-3780,-776) -3776.63,-779.37 -3736,-779.37 -3731.37,-779.37 ; MSP430.33 -49.21,-633.21 v2(-36,-620) ; R6.2@244.63,-961.37 264,-942 U5.2
  Bottom Layer w10: v2(-36,-620) -2,-654 -2,-760 196,-958
NetC1_1: C1.1 C10.2 D6.2 D8.1
NetC2_1: C2.1 C6.1 D7.2 R1.2 | length 102.3
  Top Layer w20: R1.2 C6.1 -81.37,-362 -44.31,-324.94 C2.1
NetCs1_1: Cs1.1 Cs2.1 Cs3.1 Cs4.1 Lt_2.2 | length 402.6
  Bottom Layer w15: Cs4.1 Cs3.1 -40,-208.31 ; Lt_2.2 -40,-208.31 ; Cs1.1 Cs2.1 -40,-208.31
NetCs1_2: Cs1.2 D1.3 | length 34
  Bottom Layer w12: D1.3 Cs1.2
NetCs2_2: Cs2.2 D2.3 | length 34
  Bottom Layer w12: D2.3 Cs2.2
NetCs3_2: Cs3.2 D3.3 | length 34
  Bottom Layer w12: D3.3 Cs3.2
NetCs4_2: Cs4.2 D4.3 | length 34
  Bottom Layer w12: D4.3 Cs4.2
NetCs6_1: Cs6.1 Cs7.1 Cs8.1 Lt.2 | length 212
  Top Layer w20: Cs7.1@-42,-142.31 Cs8.1
NetCs6_2: Cs6.2 D6.3 | length 30.2
  Top Layer w10: D6.3 D6.3@76.02,-183.69
  Top Layer w20: D6.3@76.02,-183.69 Cs6.2
NetCs7_2: Cs7.2 D7.3 | length 33
  Top Layer w20: D7.3 -51.98,-179.69 Cs7.2
NetCs8_2: Cs8.2 D8.3 | length 31
  Top Layer w10: 183.98,-181.69 D8.3
  Top Layer w20: Cs8.2 183.98,-181.69
NetCt_1_2: Ct_1.2 Lt_1.1 SW1.5 | length 82.7
  Bottom Layer w15: SW1.5 -100.61,-66.61 -90.31,-56.31 Ct_1.2 -44,-56.31 Lt_1.1
NetCt_2_1: Ct_2.1 Lt_2.1 SW1.8 | length 87
  Bottom Layer w15: SW1.8 -100.61,-143.39 -88.31,-155.69 Ct_2.1 Lt_2.1@-40,-155.69
NetL21_2: L21.2 U2.20 | length 241.6
  Top Layer w15: U2.20 351.5,-539.58 351.5,-458.19 351.59,-458.1 351.59,-355.82 L21.2@392.39,-315.03
NetLED1_1: LED1.1 R10.2 | length 28.6
  Top Layer w15: LED1.1 R10.2
NetLED2_1: LED2.1 R11.2 | length 28.6
  Top Layer w15: LED2.1 R11.2
NetLt_1_2: Lt_1.2 Q2.2 uP*.3 | length 103.9
  Bottom Layer w15: Lt_1.2 47.69,-108 78,-108
NetMSP430_17: MSP430.17 Pout2.4 | length 629.2
  Top Layer w10: -3462,-810 -3368,-810 ; MSP430.17 359.53,-837.53 514,-992 Pout2.4
NetR7_2: R7.2 U5.5 U5.6 | length 64.6
  Top Layer w10: U5.5 U5.6 R7.2
NetR8_2: R8.2 U5.3 | length 130.2
  Top Layer w10: -3691.12,-779.69 -3677.68,-779.69 -3668,-770 ; 308,-952 308,-918.56 321.15,-905.41 336.28,-905.41 R8.2
NetR14_1: R14.1 R15.2 U2.12 | length 572
  Top Layer w6: R15.2 51.69,-504.31 36,-520 36,-586.5 55.5,-606 104,-606 136,-638 136,-660 224,-748 294,-748 314.31,-727.69 R14.1
  Top Layer w8: U2.12 266.94,-670.94 302,-706 R14.1
NetR15_1: R15.1 R18.1 R20.1 U2.8 | length 201.8
  Top Layer w8: R18.1@97.69,-574 102.72,-579.04 186.96,-579.04 192,-579.04
  Top Layer w10: R15.1 98,-543.69 98.31,-544 98.31,-573.37 R18.1@97.69,-574 ; 186.96,-579.04 U2.8
NetR16_1: R16.1 R17.2 U2.11 | length 124.5
  Top Layer w6: R17.2 242.94,-639.69 U2.11 247.26,-674.43 R16.1
NetR17_1: R17.1 R18.2 U2.10 | length 203.9
  Top Layer w6: R18.2@58.31,-574 78.31,-594 156,-594 180,-618 U2.10@221.26,-618
  Top Layer w10: R18.2@58.31,-574 R18.2@60.48,-574 ; U2.10@210,-618 U2.10@221.26,-618 ; U2.10 U2.10@221.26,-618 ; U2.10@230,-618 U2.10@221.26,-618
NetR19_1: R19.1 R20.2 U2.7 | length 141.3
  Top Layer w10: R20.2@137.69,-544 R19.1 156,-508 207.35,-559.35 U2.7
NetR21_1: R21.1 R22.2 U2.3 | length 340.3
  Top Layer w10: R21.1 149.69,-384.63 273.52,-384.63 286.63,-397.74 U2.3
  Top Layer w15: R22.2 127.37,-392.31 R21.1
RF_RX: MSP430.39 U1.1 | length 475.1
  Top Layer w10: U1.1 -284,-367.81 -284,-664 -208.9,-739.1 MSP430.39
RF_TX: MSP430.38 Q1.3 | length 518.4
  Top Layer w10: -254,-566 -254,-630 -164.58,-719.42 MSP430.38 ; -244,-156 -242.98,-157.02 -159.04,-157.02 Q1.3@-107.86,-157.02
  Bottom Layer w10: v2(-484,-578) -484,-454 -456,-426
  other v2: -474,-142
RST: MSP430.23 R12.1 SBW1.2 | length 605.8
  Top Layer w10: MSP430.23 171.42,-719.42 216,-764 484,-764 596,-652 SBW1.2 606,-650 638,-650 664.31,-676.31 R12.1@666,-676.31
RX_EN: C5.1 MSP430.40 U1.5 | length 636.1
  Top Layer w10: C5.1 -288.19,-288 U1.5 -283.59,-307.59 -308,-332 -308,-670 -219.21,-758.79 MSP430.40
STAGE1: Cp1.1 Cp2.2 D1.2 D2.1
STAGE2: Cp2.1 Cp3.2 D2.2 D3.1
STAGE3: Cp3.1 Cp4.2 D3.2 D4.1
STAGE4: Cev.1 Cp4.1 D4.2 SW2.2 | length 450.6
  Bottom Layer w10: -264,-440 -74.31,-440 Cev.1 ; 50,-446 104,-500 148,-500 175.34,-527.34 SW2.2
  Bottom Layer w12: -309.69,-406 Cp4.1 -289.69,-414.31 -264,-440
SV: MSP430.26 SV.1 U2.13 U3.3 | length 994.5
  Top Layer w10: v2(88,-630) 88,-670.61 MSP430.26 ; U2.13 286.63,-660.63 294,-668 v2(360,-668) ; U3.3 625.24,-357.24 628,-360
  Vreg w10: v2(88,-630) 322,-630 v2(360,-668)
  Bottom Layer w10: v2(360,-668) 450,-668 588,-530 ; 360,-458 358,-456 358,-386 398,-346 ; 590,-532 590,-472 SV.1
TB0: 0.1 MSP430.1 | length 1092.9
  Top Layer w6: 0.1 -4546,-1248 -4546,-924 -4416,-794 -4136,-794 ; -160,-976 -128.81,-944.81 MSP430.1
TB1: 1.1 MSP430.6 | length 796.6
  Top Layer w6: -3985.84,-783.84 -4044,-842 -4052,-842 -4146,-936 -4146,-1248 1.1 ; -9.84,-965.84 MSP430.6
TB2: 2.1 MSP430.11 | length 784.2
  Top Layer w6: -3887.42,-780.58 -3750,-918 -3750,-1244 2.1 ; 88.58,-962.58 MSP430.11
TB3: 3.1 MSP430.45 | length 1540.9
  Top Layer w6: -4562,-894 -4562,-1632 3.1 ; -586,-1076 -367.21,-857.21 MSP430.45
TB4: 4.1 MSP430.5 | length 1199
  Top Layer w6: -4005.53,-778.1 -4015.97,-788.54 -4016.54,-788.54 -4164,-936 -4164,-1630 4.1 ; MSP430.5@-29.53,-960.1 MSP430.5
TB5: 5.1 MSP430.10 | length 1192.3
  Top Layer w6: -3907.1,-788.9 -3766,-930 -3766,-1628 5.1 ; 68.9,-970.9 MSP430.10
TB6: 6.1 MSP430.43 | length 1984.5
  Top Layer w6: -4578,-886 -4578,-2016 6.1 ; -602,-1068 -351.84,-817.84 MSP430.43
TB7: 7.1 MSP430.4 | length 1607.1
  Top Layer w6: -4025.21,-779.21 -4184,-938 -4184,-2010 7.1 ; MSP430.4@-49.21,-961.21 MSP430.4
TB8: 8.1 MSP430.9 | length 1600.5
  Top Layer w6: -3926.79,-795.21 -3782,-940 -3782,-2012 8.1 ; 49.21,-977.21 MSP430.9
TB9: 9.1 MSP430.3 | length 2012.2
  Top Layer w6: -4044.9,-779.93 -4200,-935.03 -4200,-2394 9.1 ; -68.9,-961.93 MSP430.3
TB#: #.1 MSP430.8 | length 2008.6
  Top Layer w6: -3946.47,-795.53 -3800,-942 -3800,-2394 #.1 ; 29.53,-977.53 MSP430.8
TB*: *.1 MSP430.42 | length 2434.5
  Top Layer w6: -4596,-862 -4596,-2406 *.1@-4380,-2622 ; -620,-1044 -374.16,-798.16 MSP430.42
TBCNTRL1: A.1 MSP430.2 | length 426.1
  Top Layer w6: A.1 -4366,-1018 -4160,-812 -4098.48,-812 -4064.58,-778.1 ; MSP430.2@-88.58,-960.1 MSP430.2
TBCNTRL2: B.1 MSP430.7 | length 259.3
  Top Layer w6: B.1 B.1@-3966.16,-1008.16 ; 9.84,-1190.16 MSP430.7
TBCNTRL3: C.1 MSP430.12 | length 398
  Top Layer w6: C.1@-3585,-1017 C.1@-3575,-1017 ; MSP430.12 136.81,-944.81 391,-1199
TEST: MSP430.22 SBW1.3 | length 522.1
  Top Layer w10: MSP430.22 168.48,-739.1 211.37,-782 528,-782 SBW1.3@608,-702
UP/SPK_EN: MSP430.35 SW1.2 SW2.4 | length 662.8
  Top Layer w10: v2(-118,-604) -88.58,-633.42 MSP430.35
  Bottom Layer w10: -436,-130 v2(-418,-112) -384,-112 -378.2,-117.8 SW1.2 ; -206,-516 v2(-118,-604) -78,-604 -52,-578 176,-578 200.93,-602.93 SW2.4
UP_OUT: MSP430.19 Pout2.2 | length 510.1
  Top Layer w10: MSP430.19 380.16,-798.16 474,-892 Pout2.2
VBAT: C12.2 U2.18 | length 43.1
  Top Layer w10: U2.18 393.35,-579.04 C12.2
VDD_UP: MSP430.18 Pout2.3 | length 522.6
  Top Layer w10: MSP430.18 373.84,-817.84 498,-942 Pout2.3
VMEAS: MSP430.16 R8.1 R9.2 | length 195
  Top Layer w10: MSP430.16 254.71,-857.19 277.52,-880 R9.2 R8.1
VRECT: C10.1 C24.2 C25.2 D8.2 L21.1 U2.2 | length 439.8
  Top Layer w15: C10.1 250,-320 306.31,-376.31 U2.2
  Top Layer w20: C25.2 C24.2 192,-352 230,-314
  other v2: 322,-440
VREF_SAMP: C26.2 R24.1 R25.2 U2.4 | length 106.6
  Top Layer w10: C26.2@258.31,-481.04 266.94,-489.67 U2.4 ; C26.2 R24.1@263.69,-410
VREG: C8.2 C11.2 MSP430.37 MSP430.48 R12.2 SBW1.4 T3.1 U3.5 | length 615.9
  Top Layer w10: v2(-232,-938) -188.31,-938 C11.2 -158.23,-937.69 MSP430.48 ; v2@-142,-660 -142,-694.54 MSP430.37 ; 436,-118 502,-184 T3.1 ; C8.2@462,-254 497.84,-254 U3.5 ; T3.1@488,-176 T3.1 ; T3.1@510,-182 510,-118 ; 568,-116 578,-116 504,-190 T3.1 ; SBW1.4 605.69,-753.69 628,-753.69 R12.2@666,-715.69
  Top Layer w25: U3.5@506,-259.35 T3.1@506,-216
  other v2: -146,-656
VSIG: C6.2 R1.1 R2.2 T1.1 U1.3 | length 278
  Top Layer w15: U1.3 -227.01,-362 -212.31,-362 ; R2.2 -212.31,-362 ; T1.1 -170,-468 -170,-362 ; R1.1 C6.2 -170,-362 ; -212.31,-362 -170,-362
VSTORE: C21.2 C22.2 C27.2 R7.1 R21.2 R24.2 SW2.6 T4.1 U2.19 U3.1 U3.4 U5.4 | length 1651.5
  Top Layer w12: R21.2 182.31,-431.69 ; 178,-468 178,-436 182.31,-431.69 ; R24.2 204,-410 182.31,-431.69 ; U2.19 374.96,-559.35 C22.2 394.31,-518.28 C27.2 410.6,-470 380,-470
  Top Layer w20: -3640.88,-781.91 -3598.22,-781.91 -3596.32,-780 v2(-3552,-780) ; U3.1 508.63,-321.65 578.42,-259.41 U3.4@580,-258 ; U3.4 581.4,-218.6 T4.1 T4.1@610,-200.16
  Top Layer w30: C27.2@429.4,-474 C27.2@434,-478.6 ; C21.2@434,-408.6 436.6,-406 436.6,-399.4 478.76,-357.24 U3.1
  Top Layer w40: C27.2@429.4,-474 429.4,-454
  Bottom Layer w12: v2(150,-456) 194,-456 230,-492 230,-746 186.18,-789.82
  Bottom Layer w15: -3617.64,-780 v2(-3552,-780) ; SW2.6@150,-612 150,-753.64 186.18,-789.82 358.36,-962
pads on no net: MSP430.13 MSP430.14 MSP430.15 MSP430.20 MSP430.21 MSP430.24 MSP430.25 MSP430.29 MSP430.30 MSP430.31 MSP430.32 MSP430.46 Q2.3 SPK1.1 SPK1.4 SW2.5 TF1.2 TF1.5 U2.14 U2.16

## Polygon pours and split planes (outlines as drawn)
GND on Top Layer "RFNEG Fill" (hatched 90Degree grid 20 track 8, remove dead copper, pour order 6): -4672,-792 -4672,-2792 -3160,-2792 -3160,-807.38 -3168.63,-792 -4672,-792
GND on Bottom Layer "Vreg-No Net" (solid, pour order 5): 2270.5,-234.57 2272.5,-237.03 3646,-237.03 3646,-2542.97 3642.5,-2547.27 3525.58,-2690.8 3492.5,-2690.8 2395.58,-2690.8 2392.5,-2694.57 2270.5,-2544.81 2270.5,-2530.08 2270.5,-235.19 2271,-234.57
VREG on Vreg "Vreg-No Net" (solid, pour order 8): 6112,-1179.69 6112,-2063.69 4732,-2063.69 4734,-2061.68 4734,-1179.69
GND on Gnd1 "Vreg-No Net" (solid, pour order 7): 6142.5,-109.69 6142.5,-997.69 4762.5,-997.69 4764.5,-995.67 4764.5,-109.69

## Keep-outs
Keep-Out Layer:
  lines w10: -4663.5,-2642 ccw(c-4516.58,-2642) -4516.58,-2788.92 -3311.42,-2788.92 ccw(c-3311.42,-2642) -3164.5,-2642 ; -687.62,752.13 cw(c-646,752.38) -646,794 762.29,794 cw(c762.29,744.79) 811.5,744.5 ; -687.5,-2824 -687.5,752.13 ; -283.5,1824 ccw(c-136.58,1824) -136.58,1677.08 ; 811.5,-2824 811.5,744.79

## Other copper
Top Layer:
  region net VRECT: 246,-256 218,-256 218,-332 246,-332
  region net GND: 42,-260 18,-260 18,-336 42,-336
  region net NetC2_1: -30,-258 -54,-258 -54,-334 -30,-334
  region net GND: -74,-256 -98,-256 -98,-332 -74,-332
  region net NetC1_1: 78,-256 78,-332 186,-332 186,-256
  region net VRECT: 278,-256 218,-256 220,-296 246,-332 316,-330 280,-296
Gnd1:
  region net GND: 3913.03,517.1 3825.03,420.6 3881.03,418.1 3915.03,414.1 3986.97,418.9
Bottom Layer:
  region net GND: -58,-86 -150,-86 -150,-126 -58,-126
  region net GND: 146,-418 146,-348 170,-348 170,-418
  region net STAGE1: 16,-418 16,-348 96,-348 96,-418
  region net STAGE2: -114,-418 -114,-348 -34,-348 -34,-418
  region net STAGE3: -244,-418 -244,-348 -164,-348 -164,-418
  region net STAGE4: -320,-418 -320,-348 -294,-348 -294,-418

## Silkscreen, mask and mechanical layers (free items; w line width, h text height)
Top Overlay:
  rectangle: -1476,-1156 -1160,-1028
  text "Tag Id#" at -1466,-972 h45
Bottom Overlay:
  text "Revision 3.0" at -3748,-2494 h45
  text "Battery-free audio tag" at -3520,-2572 h45
  text "Sensor Systems Group, UW" at -3396,-2668 h50